# Altium PCB PCB1.PcbDoc
Units mm, origin at the board's own origin, x right, y up, seen from the top; angles counter-clockwise.
Board outline 65.59 x 43.69 mm, 2 copper layers (Top Layer, Bottom Layer); 10 components, 16 nets, 52 pads, 0 vias.
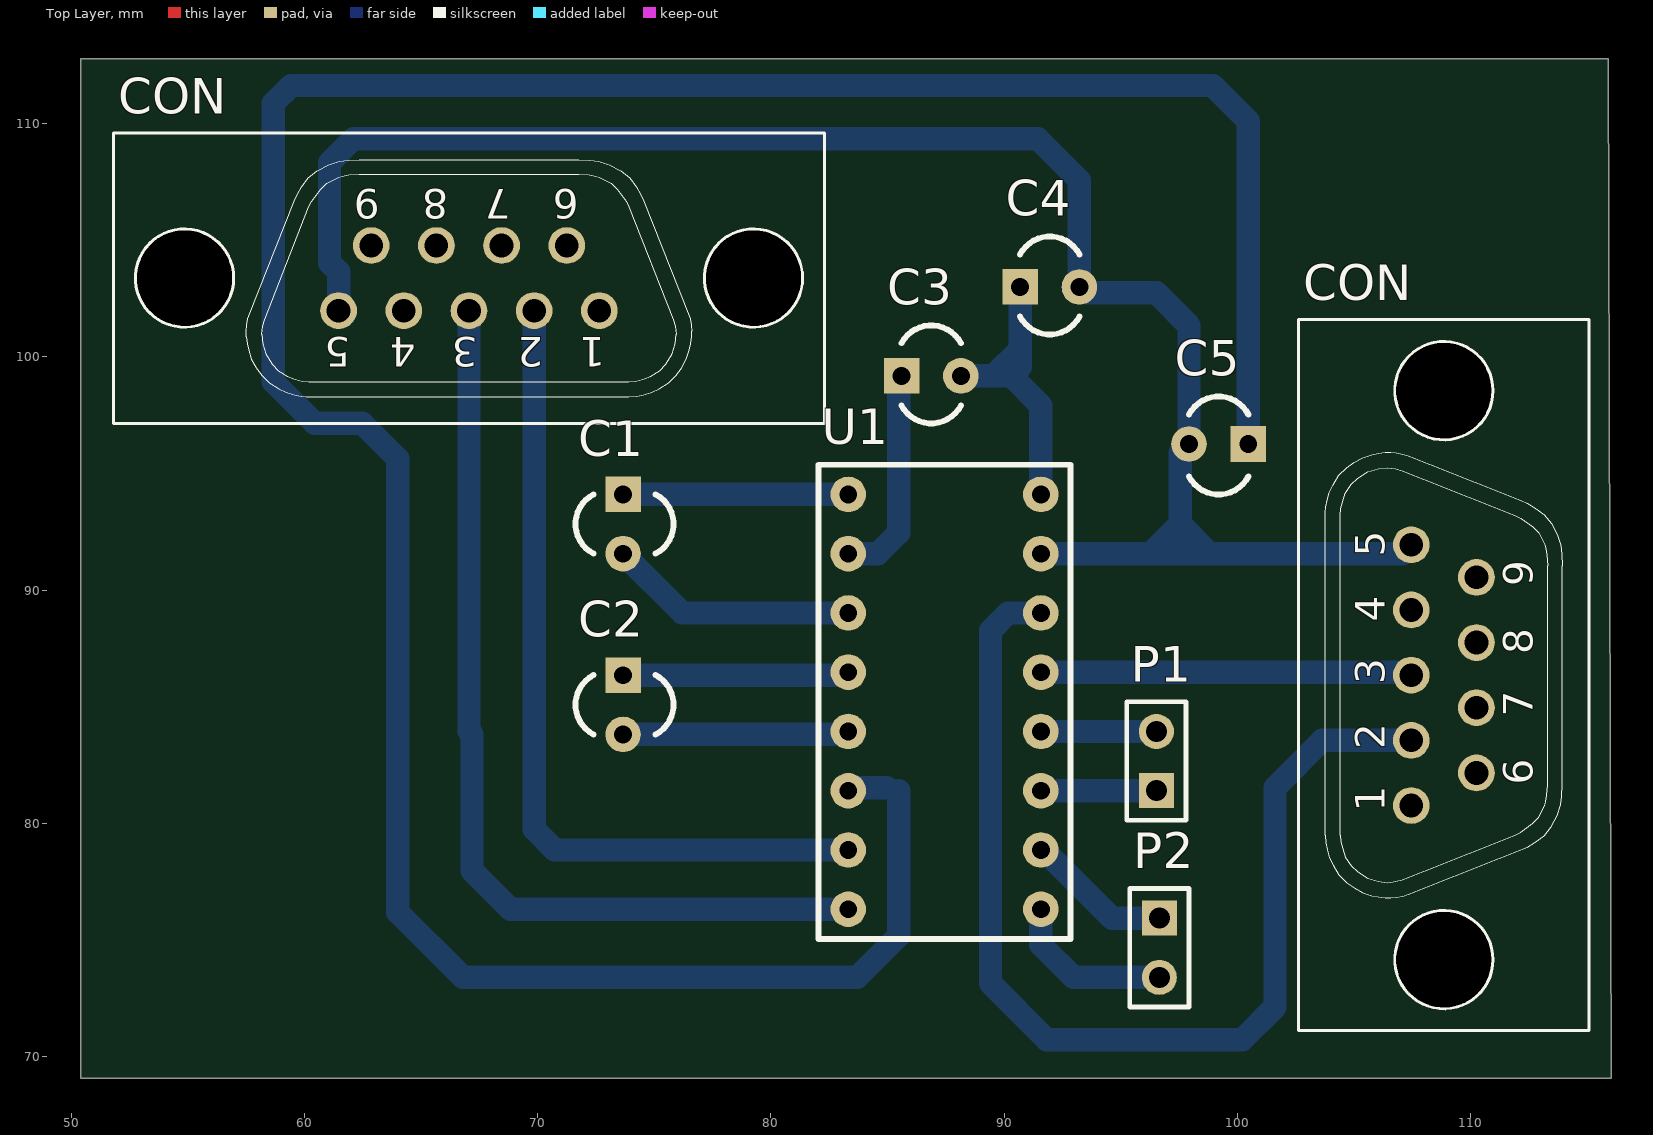
[diagram p0: Top Layer view]
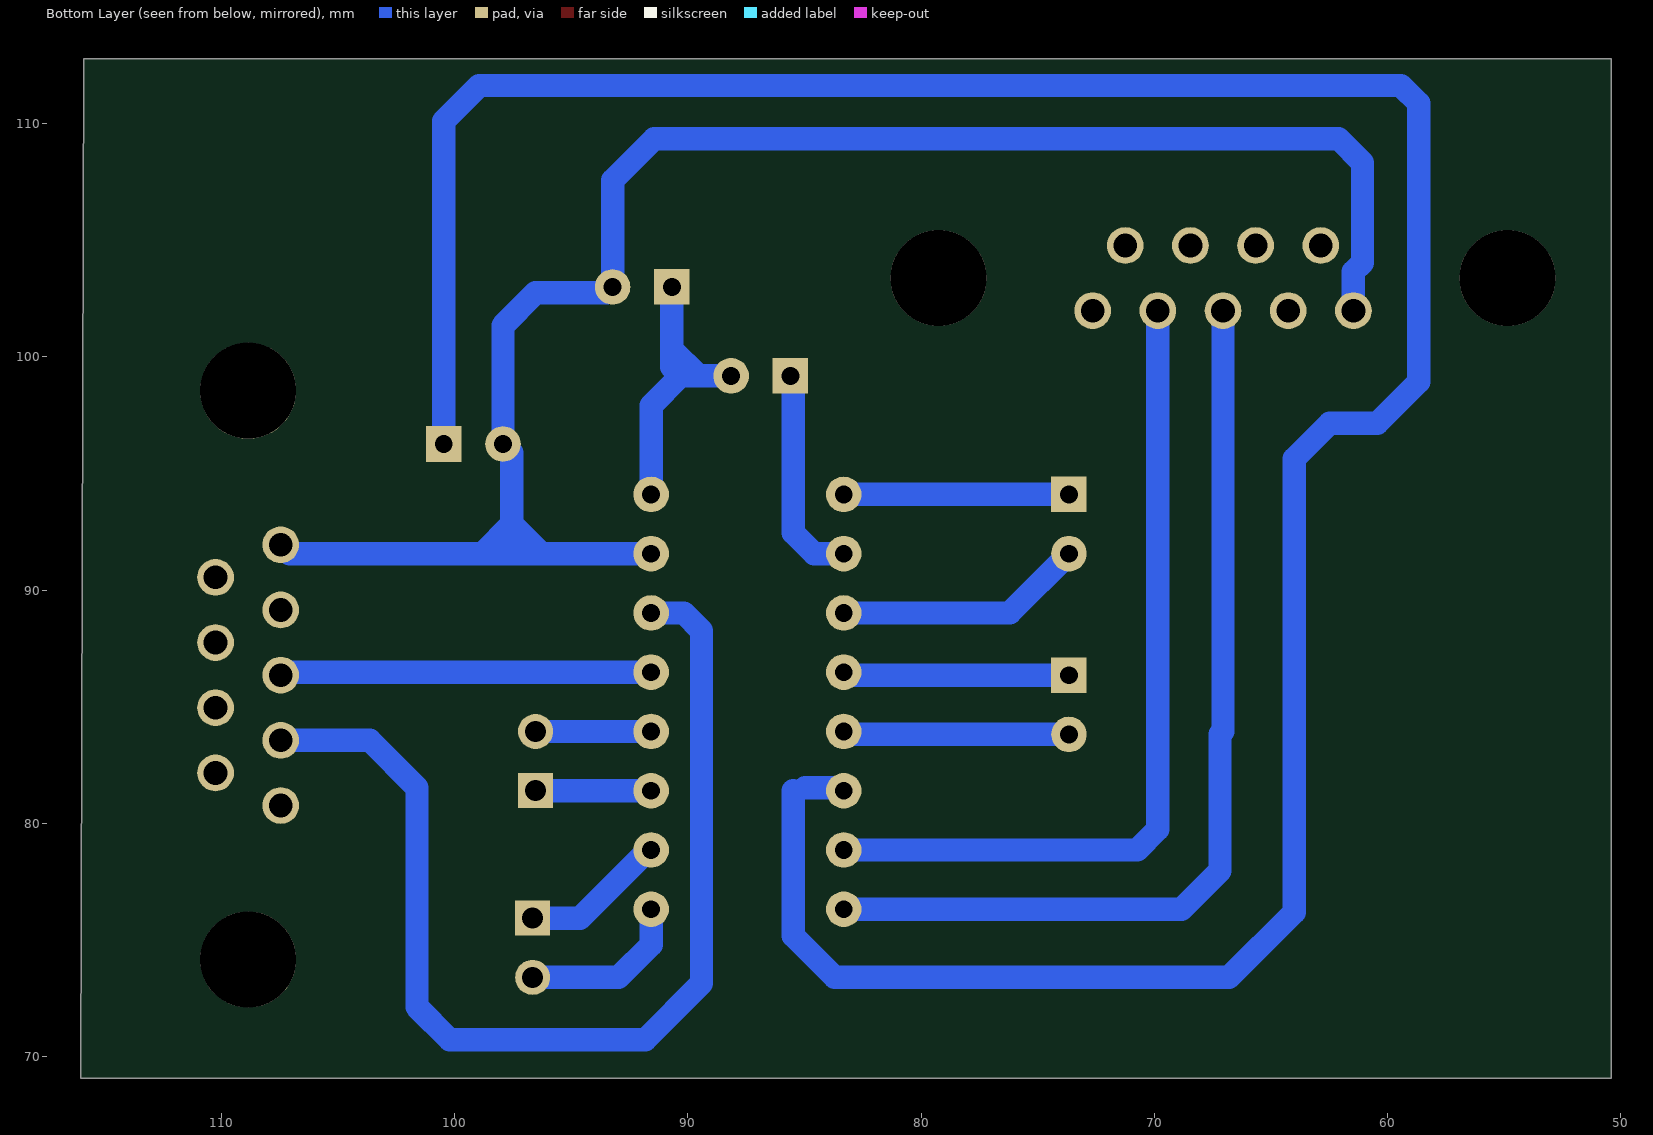
[diagram p1: Bottom Layer view, seen from below]

## Layer stack, top to bottom
Top Solder: solder mask 0.0102, Solder Resist, Dk 3.5
Top Layer: signal copper 0.0356
Dielectric 1: dielectric 0.32, FR-4, Dk 4.8
Bottom Layer: signal copper 0.0356
Bottom Solder: solder mask 0.0102, Solder Resist, Dk 3.5

## Board outline
115.889,112.776 116.011,69.088 50.419,69.088 50.419,112.776

## Design rules (kind name [scope] priority, off if disabled: settings)
Clearance [All] p1: gap=0.5 ignorepadtopadclearanceinfootprint=FALSE
PolygonConnect [All] p1: connectstyle=Relief reliefconductorwidth=0.254 reliefentries=4 polygonreliefangle="90 Angle" airgapwidth=0.254
RoutingVias [All] p1: holewidth=0.711 width=1.27 viastyle="Through Hole" minholewidth=0.711 minwidth=1.27 maxholewidth=0.711 maxwidth=1.27
SolderMaskExpansion [All] p1: expansion=0.102
Width [All] p1: maxlimit=2 minlimit=0.5 preferedwidth=1
30 further rules are at their usual default settings.

## Classes and differential pairs
component class Max232schematic: C1 C2 C3 C4 C5 CON P1 P2 U1

## Components (designator, comment, footprint, x,y, rotation, side; value= is the part's Value field where it differs from the comment)
C1 "10uf" capacitor 73.66,94.107 r0 top
C2 "10uf" capacitor 73.66,86.36 r0 top
C3 "10uf" capacitor 85.598,99.187 r90 top
C4 "10uf" capacitor 90.678,102.997 r90 top
C5 "10uf" capacitor 100.457,96.266 r270 top
CON "DB9M" D-09M 108.839,86.36 r90 top
CON "DB9M" D-09M 67.056,103.378 r180 top
P1 "Header 2" HDR1X2 96.52,81.407 r90 top
P2 "Header 2" HDR1X2 96.647,75.946 r270 top
U1 "MAX232" MAX232 83.312,94.107 r270 top

## Footprints (in the part's own frame and the unit in brackets; to place one, negate y for a bottom-side part, rotate by r counter-clockwise, add the part's x,y. Pads: shape width x height; smd on the part's side, far side on the other; paste and mask are expansions set on the pad)
capacitor [mil] "10uf"
  rect 60x60 hole 30: 1(0,0)
  round 60 hole 30: 2(0,-100)
  silkscreen extent -80,-100 85,0
D-09M [mil]
  round 62 hole 40: 1(-220,55) 2(-110,55) 3(0,55) 4(110,55) 5(220,55) 6(-165,-55) 7(-55,-55) 8(55,-55) 9(165,-55)
  round 162 hole 162 unplated: ""(-480,0) ""(480,0)
  silkscreen extent -600,-245 600,245
HDR1X2 [mm] "Connector; Header; 2 Position"
  rect 1.5x1.5 hole 0.9: 1(0,0)
  round 1.5 hole 0.9: 2(2.54,0)
  silkscreen extent -1.27,-1.27 3.81,1.27
MAX232 [mil]
  round 60 hole 30: 1(0,0) 2(100,0) 3(200,0) 4(300,0) 5(400,0) 6(500,0) 7(600,0) 8(700,0) 9(700,325) 10(600,325) 11(500,325) 12(400,325) 13(300,325) 14(200,325) 15(100,325) 16(0,325)
  silkscreen extent -50,-50 750,375

## Part data
C1 C2 C3 C4 C5: library part capacitor
CON CON: "Adapter Connector D-Sub, 9 Pin Male To D-Sub, 9 Pin Male Free Hanging _In-Line_", Package=None, Availability=Unavailable, MF="NorComp Inc.", MP=DB9M, Price=None, SnapEDA_Link=https://www.snapeda.com/parts/DB9M/NorComp%20Inc./view-part/558713/?ref=snap
P1 P2: "Header, 2-Pin", LatestRevisionDate=17-Jul-2002, LatestRevisionNote="Re-released for DXP Platform.", Publisher="Altium Limited"

## Nets (pads, with @x,y where several pads share a name; then routed paths per layer and width w, separated by ;. In a path a pad name is that pad's centre, name@x,y a point inside that pad or via, vN(x,y) a via of type N, cw(c..) or ccw(c..) an arc to the next point about the centre after c; other vN are vias at no path point)
C1+: C1.1 U1.1 | length 9.7
  Bottom Layer w1: C1.1 U1.1
C1-: C1.2 U1.3 | length 10.7
  Bottom Layer w1: C1.2 76.2,89.027 U1.3
C2+: C2.1 U1.4 | length 9.7
  Bottom Layer w1: C2.1 83.185,86.36 U1.4
C2-: C2.2 U1.5 | length 9.7
  Bottom Layer w1: C2.2 83.185,83.82 U1.5
GND: C4.2 C5.2 CON.5 U1.15 | length 79.3
  Bottom Layer w1: CON.5@61.468,101.981 61.468,103.644 61.078,104.035 61.078,108.322 62.103,109.347 91.44,109.347 93.218,107.569 C4.2 93.472,102.743 96.52,102.743 97.917,101.346 C5.2 97.536,95.885 97.536,92.837 ; U1.15 96.266,91.567 ; CON.5@107.442,91.948 107.061,91.567 98.806,91.567 ; 96.266,91.567 97.536,91.567 ; 96.266,91.567 97.536,92.837 ; 97.536,91.567 98.806,91.567 ; 97.536,91.567 97.536,92.837 ; 97.536,92.837 98.806,91.567
R1in: CON.3@107.442,86.36 U1.13 | length 15.9
  Bottom Layer w1: U1.13 107.315,86.487 CON.3@107.442,86.36
R1out: P1.2 U1.12 | length 5
  Bottom Layer w1: U1.12 P1.2
R2in: CON.3@67.056,101.981 U1.8 | length 41.1
  Bottom Layer w1: CON.3@67.056,102.235 67.056,101.981 67.056,83.947 67.183,83.82 67.183,77.978 68.834,76.327 U1.8
R2out: P2.2 U1.9 | length 7.2
  Bottom Layer w1: U1.9 91.567,74.803 92.964,73.406 P2.2
T1in: P1.1 U1.11 | length 5
  Bottom Layer w1: U1.11 P1.1
T1out: CON.2@107.442,83.566 U1.14 | length 47.4
  Bottom Layer w1: U1.14 90.17,89.027 89.408,88.265 89.408,73.152 91.821,70.739 100.203,70.739 101.6,72.136 101.6,81.534 103.632,83.566 CON.2@107.442,83.566
T2in: P2.1 U1.10 | length 6.3
  Bottom Layer w1: U1.10 91.694,78.867 94.615,75.946 P2.1
T2out: CON.2@69.85,101.981 U1.7 | length 36.2
  Bottom Layer w1: CON.2@69.85,102.108 69.85,101.981 69.85,79.756 70.739,78.867 U1.7
Vcc: C3.2 C4.1 U1.16 | length 13.3
  Bottom Layer w1: C3.2 89.535,99.187 ; C4.1 90.678,100.33 ; U1.16 91.567,97.917 90.297,99.187 ; 89.535,99.187 90.297,99.187 ; 89.535,99.187 90.678,100.33 ; 90.297,99.187 90.678,99.568 90.678,100.33
Vs+: C3.1 U1.2 | length 8.9
  Bottom Layer w1: U1.2 84.582,91.567 85.471,92.456 C3.1@85.471,98.806
Vs-: C5.1 U1.6 | length 125.9
  Bottom Layer w1: U1.6 83.439,81.534 84.963,81.534 ; 85.471,81.407 85.471,75.184 83.693,73.406 66.802,73.406 64.008,76.2 64.008,95.631 62.484,97.155 60.452,97.155 58.674,98.933 58.674,110.871 59.436,111.633 98.933,111.633 100.457,110.109 C5.1
pads on no net: CON. CON.1 CON.4 CON.6 CON.7 CON.8 CON.9

## Silkscreen, mask and mechanical layers (free items; w line width, h text height)
Mechanical 1:
  lines w0.254: 50.927,112.649 50.927,69.469 115.697,69.469 115.824,69.342 115.824,112.649 115.951,112.776 50.927,112.776

## Text inside footprints (layer, text, board x,y; h text height)
CON: Top Overlay "1" at 106.295,80.509 h1.27 r90; Top Overlay "2" at 106.297,83.183 h1.27 r90; Top Overlay "3" at 106.299,85.979 h1.27 r90; Top Overlay "4" at 106.298,88.646 h1.27 r90; Top Overlay "5" at 106.299,91.441 h1.27 r90; Top Overlay "6" at 112.656,81.652 h1.27 r90; Top Overlay "7" at 112.654,84.579 h1.27 r90; Top Overlay "8" at 112.649,87.249 h1.27 r90; Top Overlay "9" at 112.657,90.178 h1.27 r90
CON: Top Overlay "1" at 72.907,100.834 h1.27 r180; Top Overlay "2" at 70.233,100.836 h1.27 r180; Top Overlay "3" at 67.437,100.838 h1.27 r180; Top Overlay "4" at 64.77,100.837 h1.27 r180; Top Overlay "5" at 61.975,100.838 h1.27 r180; Top Overlay "6" at 71.764,107.195 h1.27 r180; Top Overlay "7" at 68.837,107.193 h1.27 r180; Top Overlay "8" at 66.167,107.188 h1.27 r180; Top Overlay "9" at 63.238,107.196 h1.27 r180